# Altium PCB Remote.PcbDoc
Units mil, origin at the board's own origin, x right, y up, seen from the top; angles counter-clockwise.
Board outline 1605 x 1795 mil, 2 copper layers (Top Layer, Bottom Layer); 17 components, 39 nets, 74 pads, 7 vias.
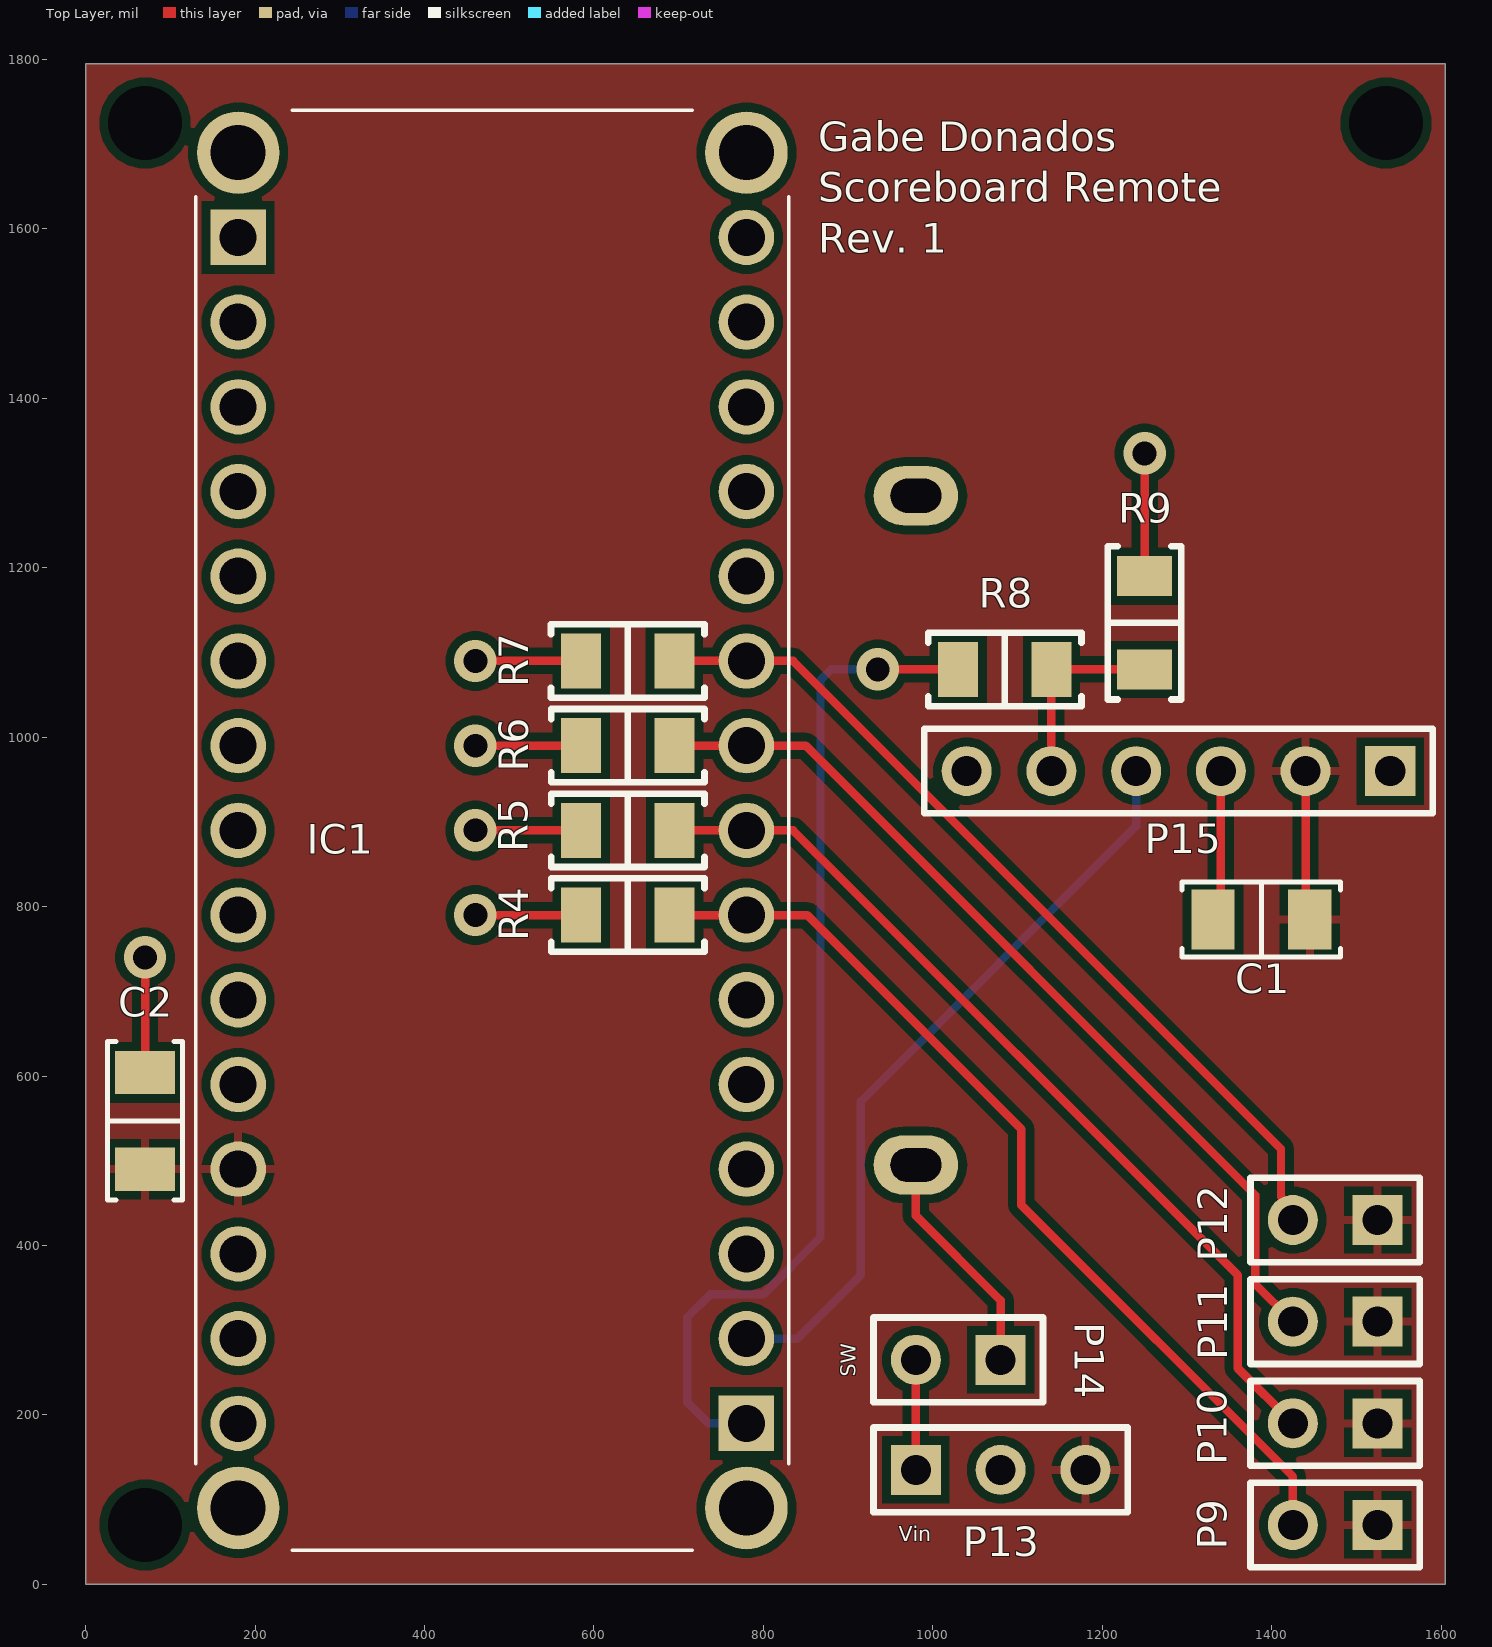
[diagram p0: Top Layer view]
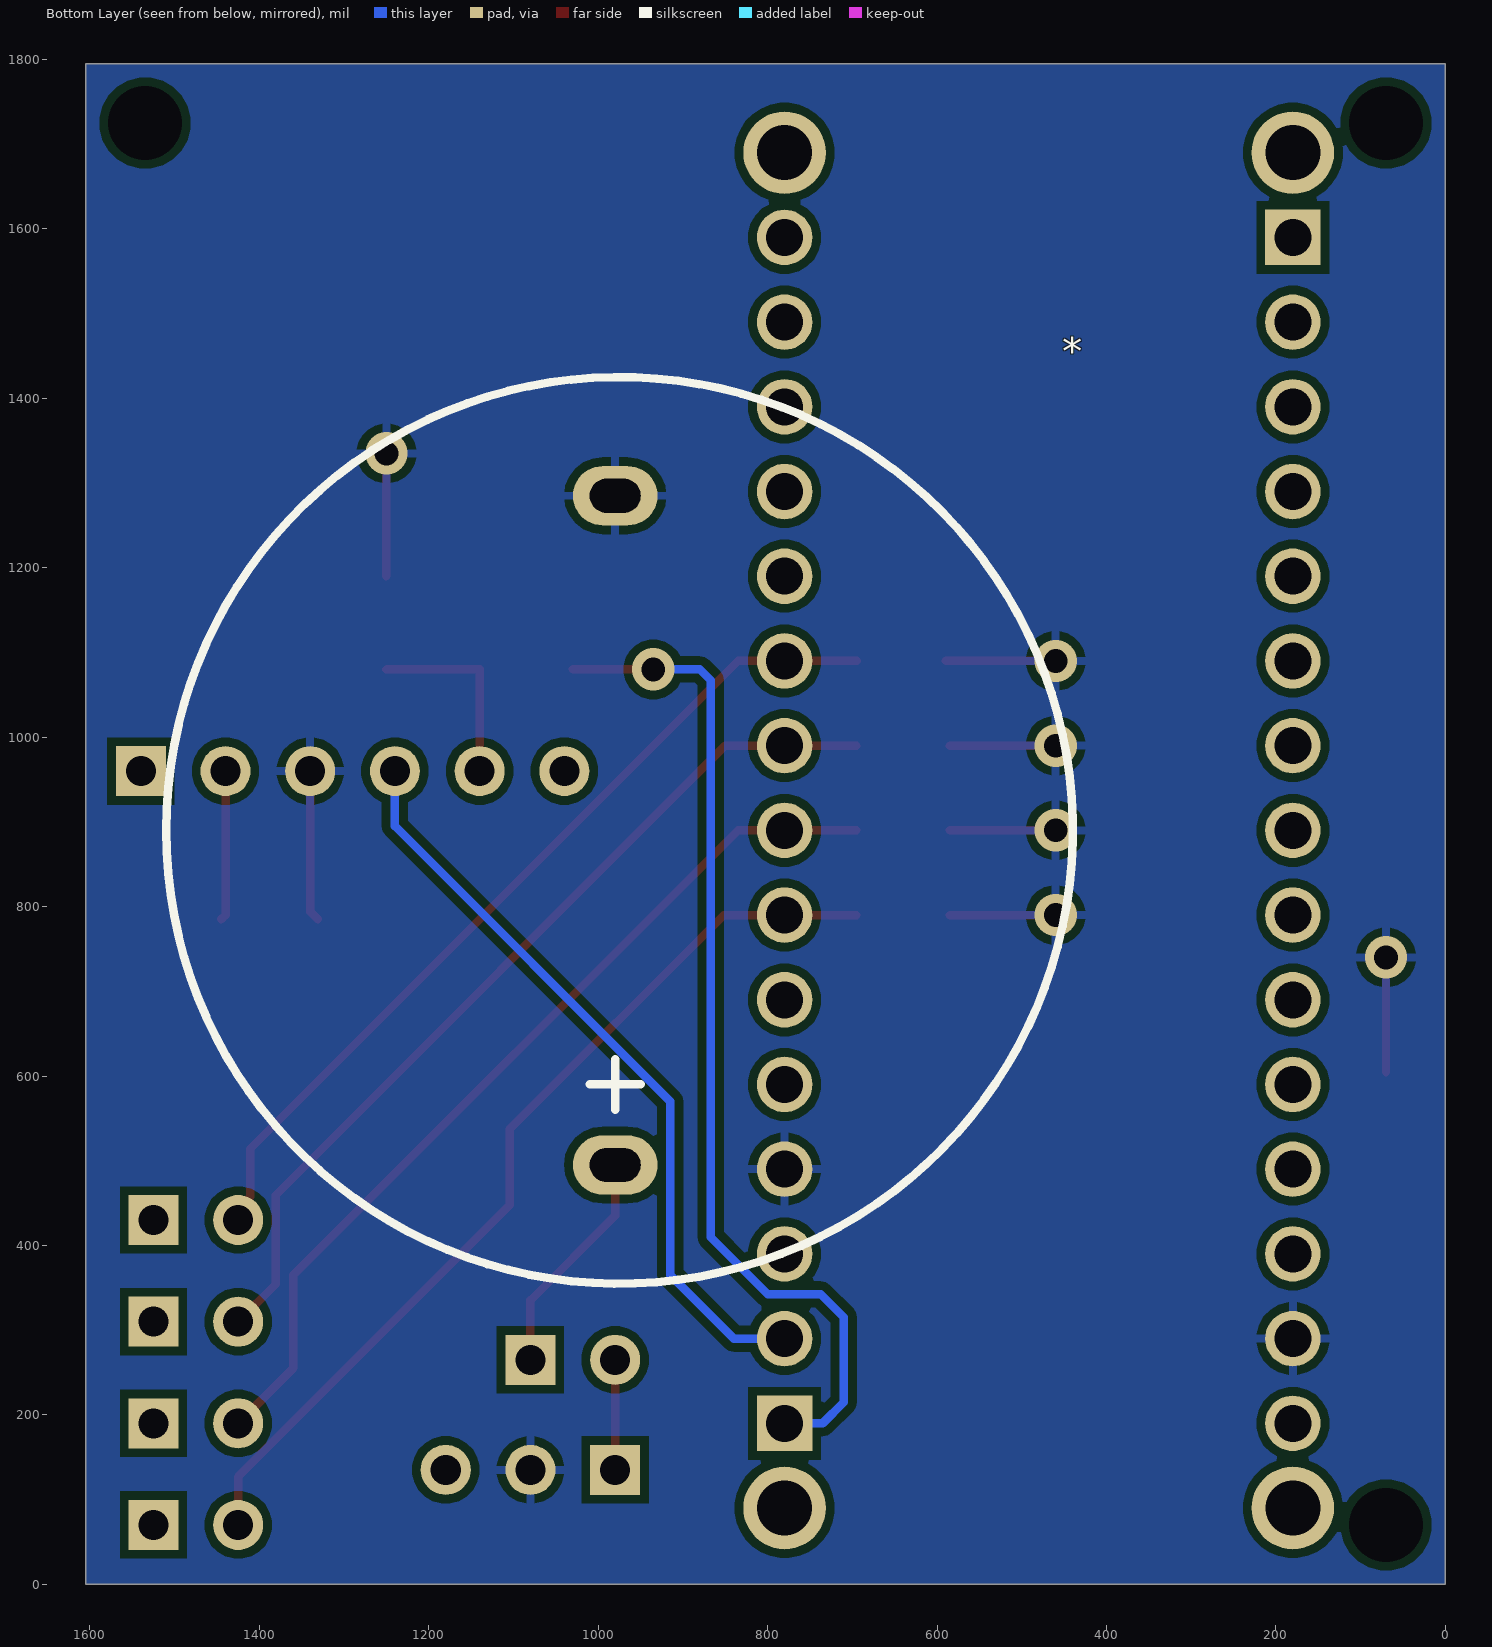
[diagram p1: Bottom Layer view, seen from below]
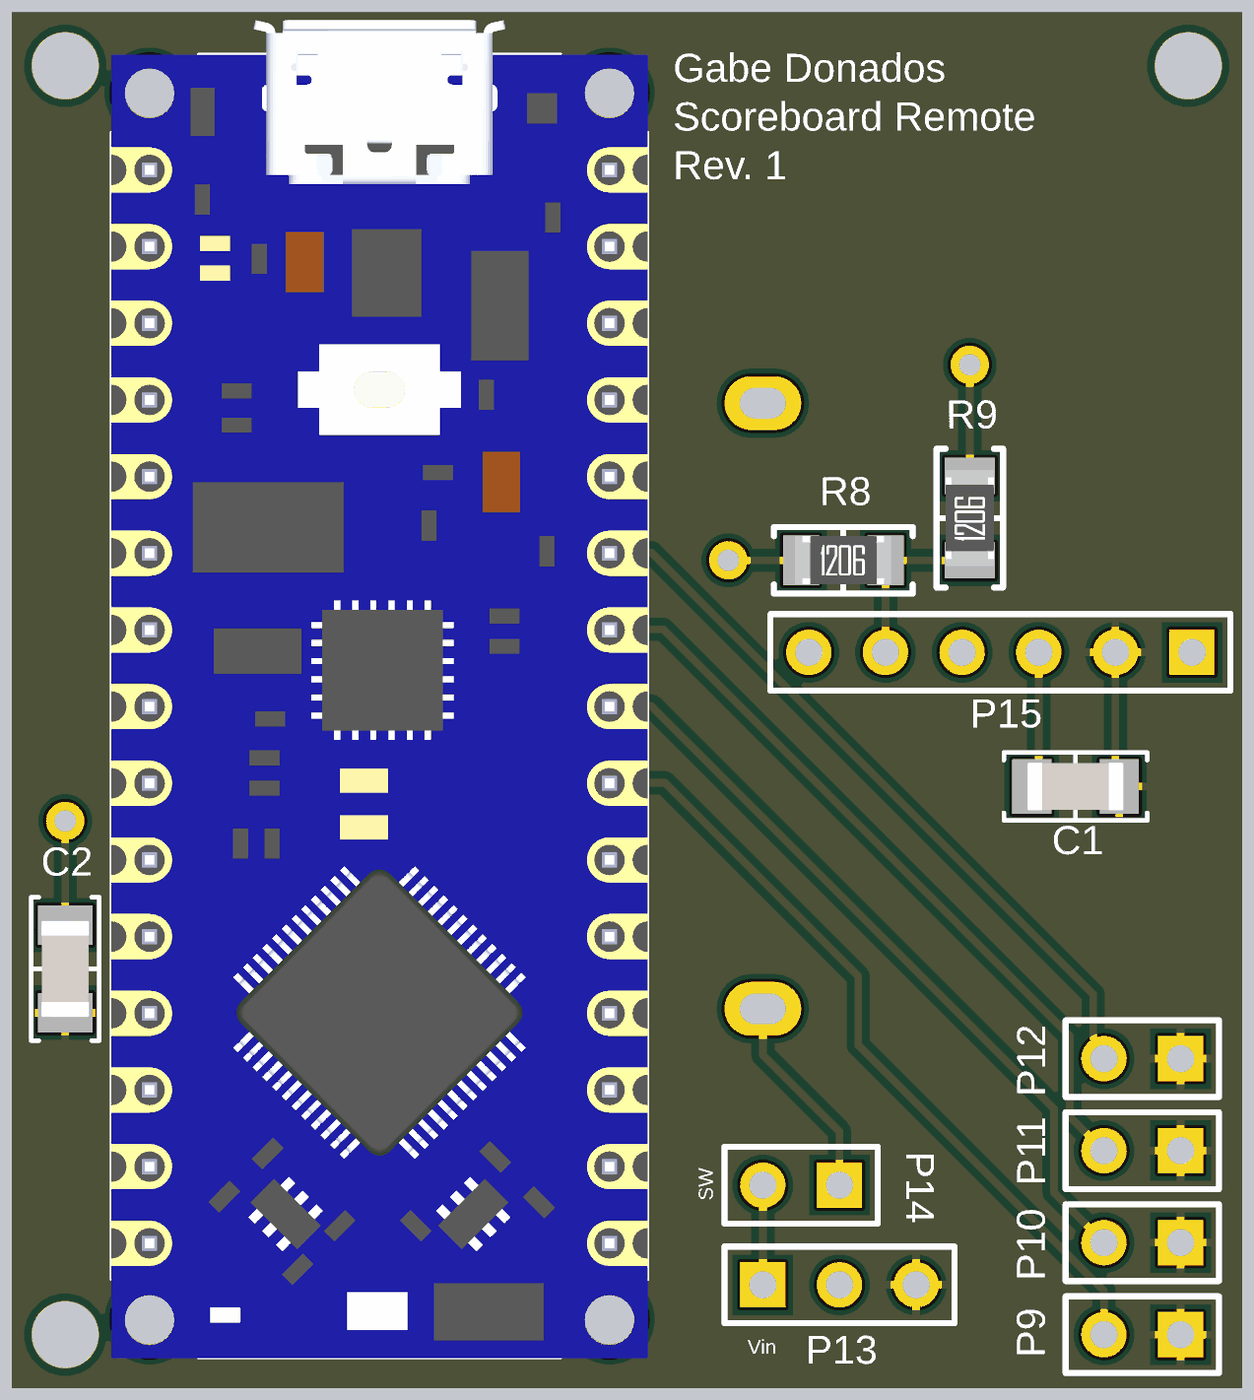
[diagram p2: 3D render of the assembled board from above, using the file's embedded part models]

## Layer stack, top to bottom
Top Solder: solder mask 0.4, Solder Resist, Dk 3.5
Top Layer: signal copper 1.4
Dielectric 1: dielectric 12.6, FR-4, Dk 4.8
Bottom Layer: signal copper 1.4
Bottom Solder: solder mask 0.4, Solder Resist, Dk 3.5

## Board outline
0,0 1605,0 1605,1795 0,1795

## Design rules (kind name [scope] priority, off if disabled: settings)
Clearance [All] p1: gap=10 ignorepadtopadclearanceinfootprint=FALSE except(0: Arc-Hole Track-Hole SMDPad-Hole THPad-Hole Via-Hole Fill-Hole Poly-Hole Region-Hole Text-Hole)
PolygonConnect [All] p1: connectstyle=Relief reliefconductorwidth=10 reliefentries=4 polygonreliefangle="90 Angle" airgapwidth=10
RoomDefinition Remote [InComponentClass('Remote')] p1: confinementstyle=ConfineIn formatcopy=TRUE lockcomponents=FALSE outline -50,-30 1635,-30 1635,1825 -50,1825
RoutingVias [All] p1: holewidth=28 width=50 viastyle="Through Hole" minholewidth=28 minwidth=50 maxholewidth=28 maxwidth=50
SilkToSolderMaskClearance [IsPad] p1: minsilkscreentomaskgap=5 clearancetoexposedcopper=TRUE
SolderMaskExpansion [All] p1: expansion=4 istentingtop=FALSE
Width [All] p1: maxlimit=10 minlimit=10 preferedwidth=10
29 further rules are at their usual default settings.

## Components (designator, comment, footprint, x,y, rotation, side; value= is the part's Value field where it differs from the comment)
* "CR2032 Holder" "CR2032 Holder-Footprint-1" 975,890 r90 bottom locked
C1 "0.1 µF" "CAP 1206_3216 - 0.8MM" 1387.91,785 r0 top
C2 "0.1 µF" "CAP 1206_3216 - 0.8MM" 70,547.09 r270 top
IC1 "ABX00028" ABX00028 180,1590 r270 top locked
P9 "Header 2" HDR1X2 1525,70 r180 top
P10 "Header 2" HDR1X2 1525,190 r180 top
P11 "Header 2" HDR1X2 1525,310 r180 top
P12 "Header 2" HDR1X2 1525,430 r180 top
P13 "Header 3" HDR1X3 980,135 r0 top
P14 "Header 2" HDR1X2 1080,265 r180 top
P15 "HC05" HDR1X6 1540,960 r180 top
R4 "10 kOhms" "RES 1206_3216" 640,790 r0 top
R5 "10 kOhms" "RES 1206_3216" 640,890 r0 top
R6 "10 kOhms" "RES 1206_3216" 640,990 r0 top
R7 "10 kOhms" "RES 1206_3216" 639.88,1090 r0 top
R8 "1 kOhms" "RES 1206_3216" 1085,1080 r0 top
R9 "2 kOhms" "RES 1206_3216" 1250,1135 r90 top

## Footprints (in the part's own frame and the unit in brackets; to place one, negate y for a bottom-side part, rotate by r counter-clockwise, add the part's x,y. Pads: shape width x height; smd on the part's side, far side on the other; paste and mask are expansions set on the pad)
ABX00028 [mm]
  rect 1.665x1.665 hole 1.11: A1(0,0) B1(35.56,15.24)
  round 1.665 hole 1.11: A2(2.54,0) A3(5.08,0) A4(7.62,0) A5(10.16,0) A6(12.7,0) A7(15.24,0) A8(17.78,0) A9(20.32,0) A10(22.86,0) A11(25.4,0) A12(27.94,0) A13(30.48,0) A14(33.02,0) A15(35.56,0) B2(33.02,15.24) B3(30.48,15.24) B4(27.94,15.24) B5(25.4,15.24) B6(22.86,15.24) B7(20.32,15.24) B8(17.78,15.24) B9(15.24,15.24) B10(12.7,15.24) B11(10.16,15.24) B12(7.62,15.24) B13(5.08,15.24) B14(2.54,15.24) B15(0,15.24)
  round 2.475 hole 1.65: MH1(-2.54,0) MH2(-2.54,15.24) MH3(38.1,15.24) MH4(38.1,0)
  silkscreen extent -3.81,-1.27 39.37,16.51, body extent -4.94,-1.27 39.39,16.51, height 6
"CAP 1206_3216 - 0.8MM" [mm] "Chip Capacitor, 2-Leads, Body 3.25x1.60mm, IPC Medium Density"
  rect 1.3x1.8 smd: 1(-1.45,0) 2(1.45,0)
  silkscreen extent -2.37,-1.12 2.37,1.12, body extent -1.6,-0.8 1.6,0.8, height 0.8
"CR2032 Holder-Footprint-1" [mil]
  oval 70x100 hole 60 slot 40 at 0 deg: 1(-395,5) 2(395,5)
  silkscreen extent -535,-535 535,535
HDR1X2 [mm] "Connector; Header; 2 Position"
  rect 1.5x1.5 hole 0.9: 1(0,0)
  round 1.5 hole 0.9: 2(2.54,0)
  silkscreen extent -1.27,-1.27 3.81,1.27
HDR1X3 [mm] "Connector; Header; 3 Position"
  rect 1.5x1.5 hole 0.9: 1(0,0)
  round 1.5 hole 0.9: 2(2.54,0) 3(5.08,0)
  silkscreen extent -1.27,-1.27 6.35,1.27
HDR1X6 [mm] "Connector; Header; 6 Position"
  rect 1.5x1.5 hole 0.9: 1(0,0)
  round 1.5 hole 0.9: 2(2.54,0) 3(5.08,0) 4(7.62,0) 5(10.16,0) 6(12.7,0)
  silkscreen extent -1.27,-1.27 13.97,1.27
"RES 1206_3216" [mm] "Chip Resistor, 2-Leads, Body 3.13x1.55mm, IPC Medium Density"
  rect 1.2x1.65 smd: 1(-1.4,0) 2(1.4,0)
  silkscreen extent -2.3,-1.1 2.3,1.1, body extent -1.6,-0.8 1.6,0.8, height 0.6

## Part data
*: library part CMP-00005-2, "Coin cell battery holder"
C1 C2: library part CC1206MRY5V9BB104, "CAP CER 0.1UF 50V Y5V 1206", Device Package="1206 (3216 Metric)", manufacturer=Yageo, Operating Temperature="-30°C ~ 85°C", Supplier Part Number 1=311-4504-1-ND, Temperature Coefficient="Y5V (F)", Tolerance=±20%, Voltage - Rated=50V, Applications="General Purpose", Capacitance="0.1 µF", componentlink1description=Datasheet, componentlink1url=http://www.yageo.com/documents/recent/UPY-GPHC_Y5V_6.3V-to-50V_8.pdf, componentlink2description="DigiKey Link", componentlink2url=https://www.digikey.com/en/products/detail/yageo/CC1206MRY5V9BB104/5884674, lastupdated="5/13/2023 7:18:07 PM", Lifecycle Status=Active, Minimum Order=1, Mounting Type="Surface Mount, MLCC", Package / Case="1206 (3216 Metric)", packaging=TapeAndReel, Part Number=CC1206MRY5V9BB104, Part Status=Active, partid=18711, price=0.04, series=CC, Size / Dimension="0.126\" L x 0.063\" W (3.20mm x 1.60mm)", Supplier 1=DigiKey, Thickness (Max)="0.028\" (0.70mm)"
IC1: "Integrated Circuit", Manufacturer_Name=Arduino, Mouser Part Number=782-ABX00028, Arrow Part Number=ABX00028, Arrow Price/Stock=https://www.arrow.com/en/products/abx00028/arduino-corporation?region=nac, Datasheet Link=https://store.arduino.cc/arduino-nano-every, Height=10mm, Manufacturer_Part_Number=ABX00028, Mouser Price/Stock=https://www.mouser.co.uk/ProductDetail/Arduino/ABX00028?qs=PzGy0jfpSMtit6rnFl8mVg%3D%3D
P9 P10 P11 P12 P14: "Header, 2-Pin", LatestRevisionDate=17-Jul-2002, LatestRevisionNote="Re-released for DXP Platform.", Publisher="Altium Limited"
P13: "Header, 3-Pin", LatestRevisionDate=17-Jul-2002, LatestRevisionNote="Re-released for DXP Platform.", Publisher="Altium Limited"
P15: library part "Header 6", "Header, 6-Pin", LatestRevisionDate=17-Jul-2002, LatestRevisionNote="Re-released for DXP Platform.", Publisher="Altium Limited"
R4 R5 R6 R7: library part CRG1206F10K, "RES SMD 10K OHM 1% 1/4W 1206", Device Package="1206 (3216 Metric)", manufacturer="TE Connectivity Passive Product", Operating Temperature="-55°C ~ 155°C", Power (Watts)="0.25W, 1/4W", Supplier Device Package=1206, Supplier Part Number 1=A106069CT-ND, Temperature Coefficient=±100ppm/°C, Tolerance=±1%, componentlink1description=Datasheet, componentlink1url=https://www.te.com/commerce/DocumentDelivery/DDEController?Action=srchrtrv&DocNm=1773204&DocType=DS&DocLang=English, componentlink2description="DigiKey Link", componentlink2url=https://www.digikey.com/en/products/detail/te-connectivity-passive-product/CRG1206F10K/2389909, Composition="Thick Film", Height - Seated (Max)="0.026\" (0.65mm)", lastupdated="5/13/2023 7:46:04 PM", Lifecycle Status=Active, Minimum Order=1, Number of Terminations=2, Package / Case="1206 (3216 Metric)", packaging=TapeAndReel, Part Number=CRG1206F10K, Part Status=Active, partid=26989, price=0.01, Resistance="10 kOhms", series="CRG, Neohm", Size / Dimension="0.122\" L x 0.061\" W (3.10mm x 1.55mm)", Supplier 1=DigiKey
R8: library part RNCS1206BKE1K00, "RES 1K OHM 0.1% 1/8W 1206", Device Package="1206 (3216 Metric)", manufacturer="Stackpole Electronics Inc", Operating Temperature="-55°C ~ 155°C", Power (Watts)="0.125W, 1/8W", Ratings=AEC-Q200, Supplier Device Package=1206, Supplier Part Number 1=RNCS1206BKE1K00CT-ND, Temperature Coefficient=±25ppm/°C, Tolerance=±0.1%, componentlink1description=Datasheet, componentlink1url=https://www.seielect.com/catalog/sei-rncs_rnch.pdf, componentlink2description="DigiKey Link", componentlink2url=https://www.digikey.com/en/products/detail/stackpole-electronics-inc/RNCS1206BKE1K00/1800333, Composition="Thin Film", Features="Anti-Corrosive, Automotive AEC-Q200, Moisture Resistant", Height - Seated (Max)="0.026\" (0.65mm)", lastupdated="5/13/2023 7:46:05 PM", Lifecycle Status=Active, Minimum Order=1, Number of Terminations=2, Package / Case="1206 (3216 Metric)", packaging=TapeAndReel, Part Number=RNCS1206BKE1K00, Part Status=Active, partid=26856, price=0.08, Resistance="1 kOhms", series=RNCS, Size / Dimension="0.120\" L x 0.061\" W (3.05mm x 1.55mm)", Supplier 1=DigiKey
R9: library part AC1206JR-072KL, "RES SMD 2K OHM 5% 1/4W 1206", Device Package="1206 (3216 Metric)", manufacturer=Yageo, Operating Temperature="-55°C ~ 155°C", Power (Watts)="0.25W, 1/4W", Ratings=AEC-Q200, Supplier Device Package=1206, Supplier Part Number 1=YAG3946CT-ND, Temperature Coefficient=±100ppm/°C, Tolerance=±5%, componentlink1description=Datasheet, componentlink1url=https://www.yageo.com/upload/media/product/productsearch/datasheet/rchip/PYu-AC_51_RoHS_L_7.pdf, componentlink2description="DigiKey Link", componentlink2url=https://www.digikey.com/en/products/detail/yageo/AC1206JR-072KL/5897821, Composition="Thick Film", Features="Automotive AEC-Q200, Moisture Resistant", Height - Seated (Max)="0.026\" (0.65mm)", lastupdated="5/13/2023 7:46:03 PM", Lifecycle Status=Active, Minimum Order=1, Number of Terminations=2, Package / Case="1206 (3216 Metric)", packaging=TapeAndReel, Part Number=AC1206JR-072KL, Part Status=Active, partid=27112, price=0.01, Resistance="2 kOhms", series=AC, Size / Dimension="0.122\" L x 0.063\" W (3.10mm x 1.60mm)", Supplier 1=DigiKey

## Free pads (board coordinates)
  round 60 hole 87: 69(70,70) 69(70,1725) 69(1535,1725)

## Via types
v1: diameter 50, hole 28, Top Layer to Bottom Layer, 7 vias

## Nets (pads, with @x,y where several pads share a name; then routed paths per layer and width w, separated by ;. In a path a pad name is that pad's centre, name@x,y a point inside that pad or via, vN(x,y) a via of type N, cw(c..) or ccw(c..) an arc to the next point about the centre after c; other vN are vias at no path point)
+5: C1.2 C2.2 IC1.A12 P9.1 P10.1 P11.1 P12.1 P13.3 P15.2 | length 177.1
  Top Layer w10: P15.2 1440,790 C1.2
ARD_RX: IC1.B2 P15.4 | length 895.7
  Bottom Layer w10: IC1.B2 840,290 915,365 915,570 1240,895 P15.4
ARD_TX: IC1.B1 R8.1 | length 1202.3
  Top Layer w10: v1(935,1080) R8.1
  Bottom Layer w10: IC1.B1 735,190 710,215 710,315 737.22,342.22 799.79,342.22 867.39,409.83 867.39,1067.39 880,1080 v1(935,1080)
GND: *.2 C1.1 C2.1 IC1.A14 IC1.B4 P13.2 P15.3 R4.1 R5.1 R6.1 R7.1 R9.2 | length 964
  Top Layer w10: C2.1 v1(70,740) ; v1(460,790) R4.1 ; v1(460,890) R5.1 ; v1(460,990) R6.1 ; v1(460,1090) R7.1@589.88,1090 ; R9.2 v1(1250,1335) ; C1.1 1340,794.17 P15.3
Net*_1: *.1 P14.1 | length 271.4
  Top Layer w10: *.1 980,435 1080,335 P14.1
"NetArduino Mega_2": 
"NetArduino Mega_3": 
"NetArduino Mega_4": 
"NetArduino Mega_5": 
"NetArduino Mega_6": 
"NetArduino Mega_7": 
"NetArduino Mega_14": 
"NetArduino Mega_15": 
"NetArduino Mega_18": 
"NetArduino Mega_19": 
"NetArduino Mega_20": 
"NetArduino Mega_21": 
"NetArduino Mega_37": 
"NetArduino Mega_39": 
"NetArduino Mega_41": 
"NetArduino Mega_43": 
"NetArduino Mega_45": 
"NetArduino Mega_47": 
"NetArduino Mega_68": 
"NetArduino Mega_69": 
"NetArduino Mega_70": 
"NetArduino Mega_71": 
"NetArduino Mega_72": 
"NetArduino Mega_73": 
"NetArduino Mega_74": 
"NetArduino Mega_75": 
NetLED1_2: 
NetP5_5: 
NetP13_1: P13.1 P14.2 | length 137.1
  Top Layer w10: P14.2@975,270 P14.2 P13.1
NetP15_5: P15.5 R8.2 R9.1 | length 230
  Top Layer w10: P15.5 1140,1079.88 R8.2 1249.88,1080 R9.1
SW1: IC1.B7 P9.2 R4.2 | length 1114.1
  Top Layer w10: R4.2 851.72,790 1104.56,537.16 1104.56,447.47 1425,127.03 P9.2
SW2: IC1.B8 P10.2 R5.2 | length 1086.3
  Top Layer w10: R5.2 IC1.B8@782.03,890 ; IC1.B8 835,890 1360,365 1360,255 P10.2
SW3: IC1.B9 P11.2 R6.2 | length 1073.1
  Top Layer w10: R6.2 850,990 1380.47,459.53 1380.47,354.53 P11.2
SW4: IC1.B10 P12.2 R7.2 | length 1044.4
  Top Layer w10: R7.2 835,1090 1411.01,513.99 1411.01,457.26 1425,443.27 P12.2
pads on no net: IC1.A1 IC1.A2 IC1.A3 IC1.A4 IC1.A5 IC1.A6 IC1.A7 IC1.A8 IC1.A9 IC1.A10 IC1.A11 IC1.A13 IC1.A15 IC1.B3 IC1.B5 IC1.B6 IC1.B11 IC1.B12 IC1.B13 IC1.B14 IC1.B15 IC1.MH1 IC1.MH2 IC1.MH3 IC1.MH4 P15.1 P15.6

## Polygon pours and split planes (outlines as drawn)
+5 on Top Layer "+5_L01_P000" (solid, pour order 0): 0,1795 1605,1795 1605,0 0,0
GND on Bottom Layer "GND_L02_P001" (solid, pour order 1): 0,1795 1605,1795 1605,0 0,0

## Silkscreen, mask and mechanical layers (free items; w line width, h text height)
Top Overlay:
  text "Gabe Donados / Scoreboard Remote / Rev. 1" at 865,1560 h60
  text "SW" at 914.67,245 h30 r90
  text "Vin" at 960.03,45 h30
Mechanical 1:
  the board outline again, w10